# Altium PCB PCB1.PcbDoc
Units mm, origin at the board's own origin, x right, y up, seen from the top; angles counter-clockwise.
Board outline 43.65 x 62.3 mm, 2 copper layers (Top Layer, Bottom Layer); 52 components, 39 nets, 199 pads, 359 vias.
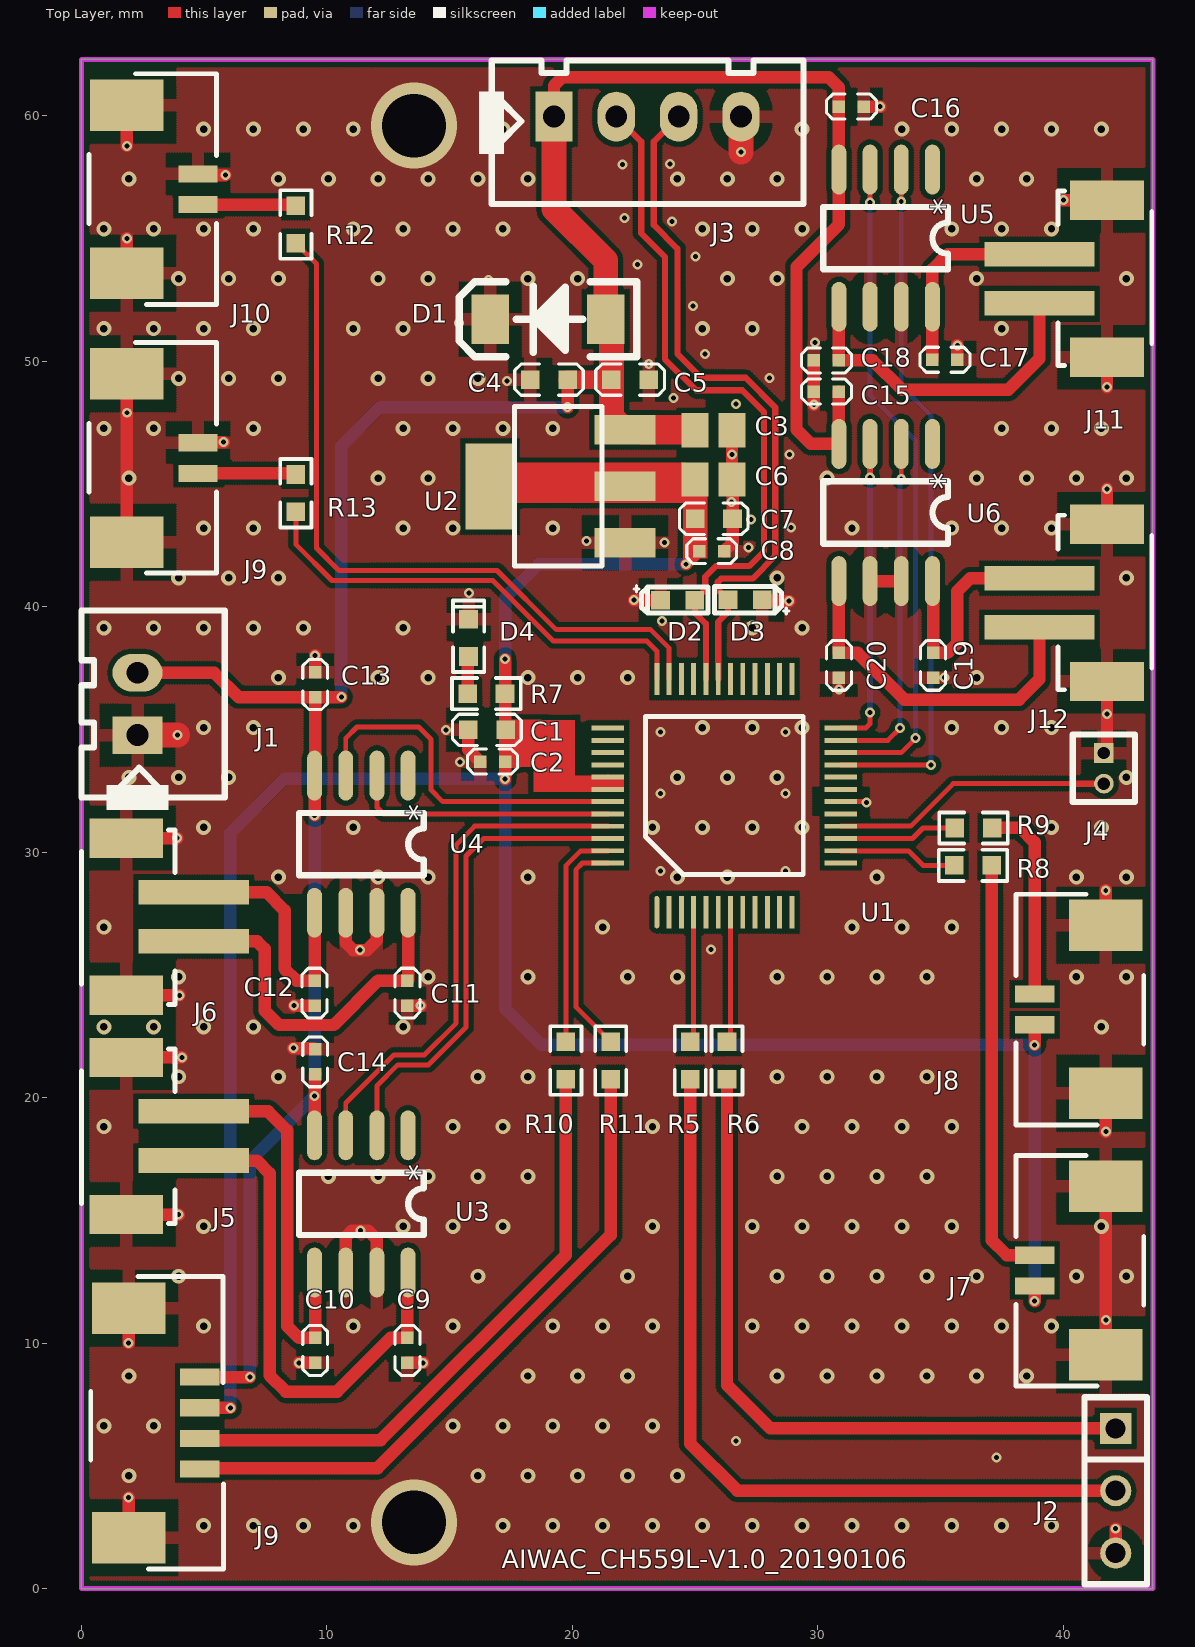
[diagram p0: Top Layer view]
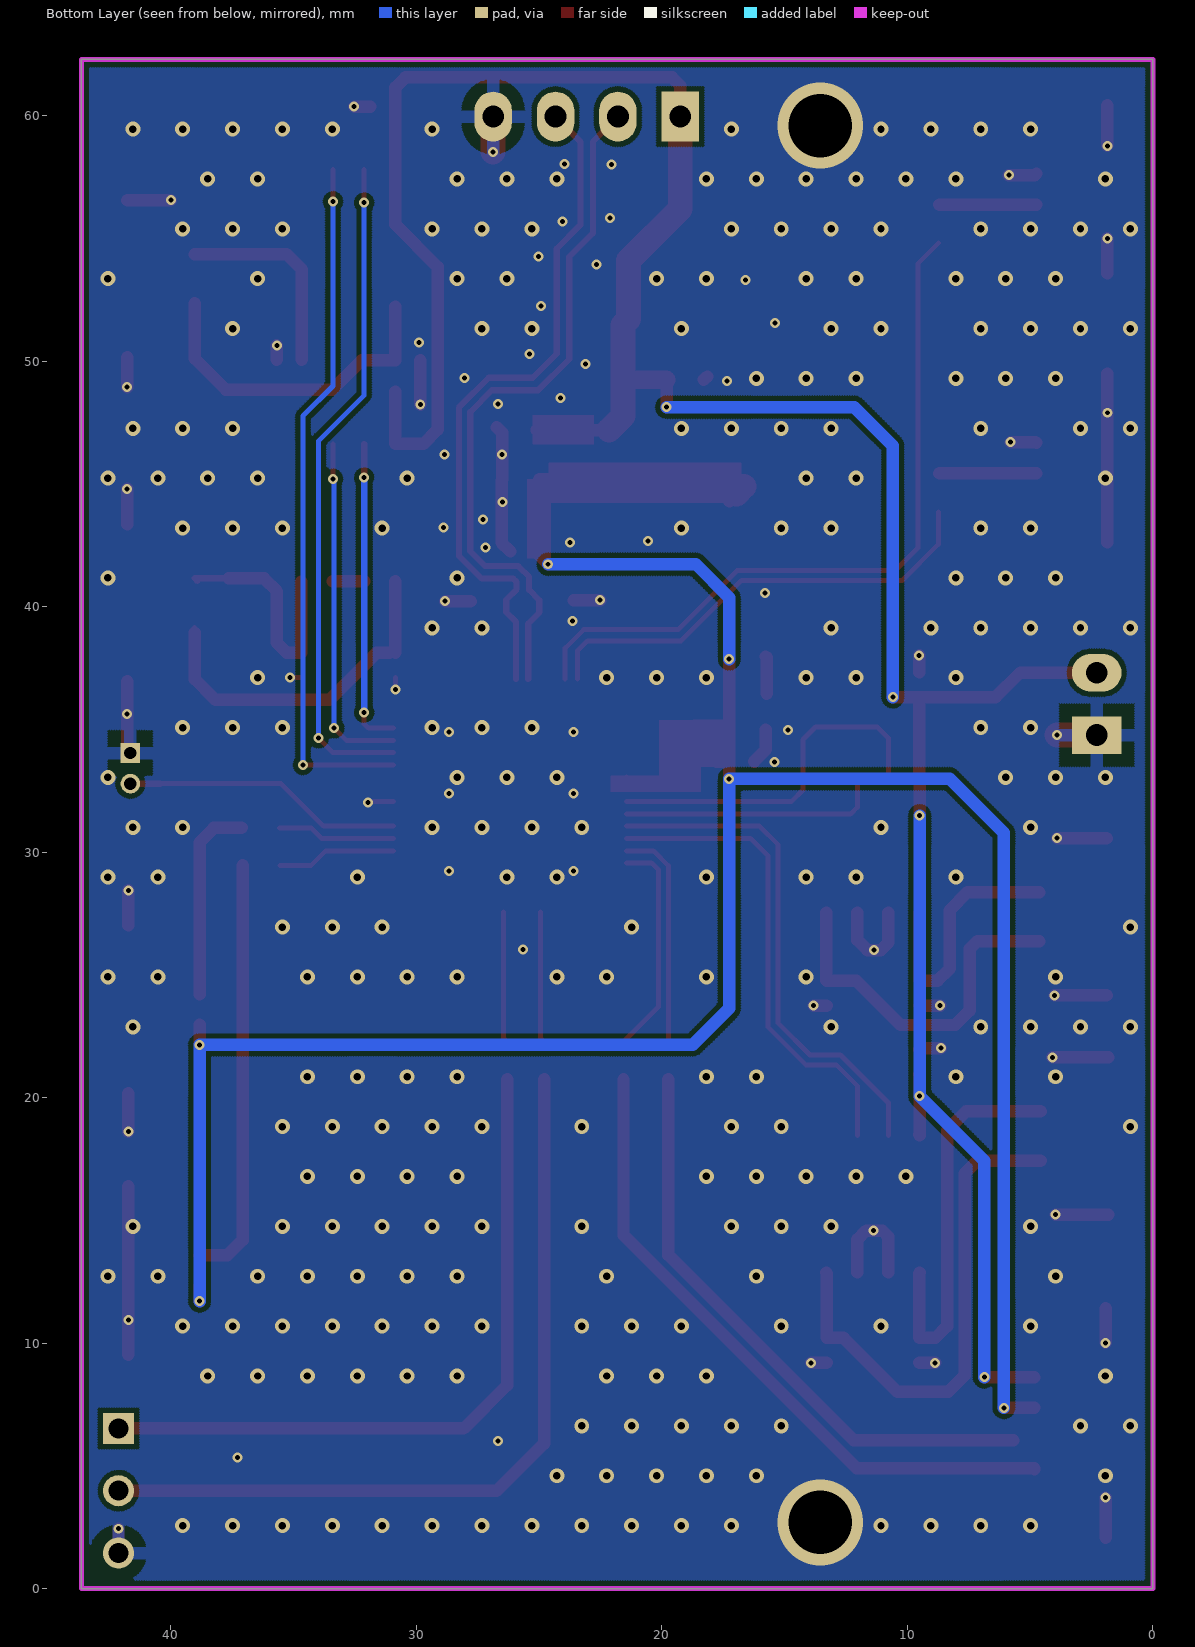
[diagram p1: Bottom Layer view, seen from below]
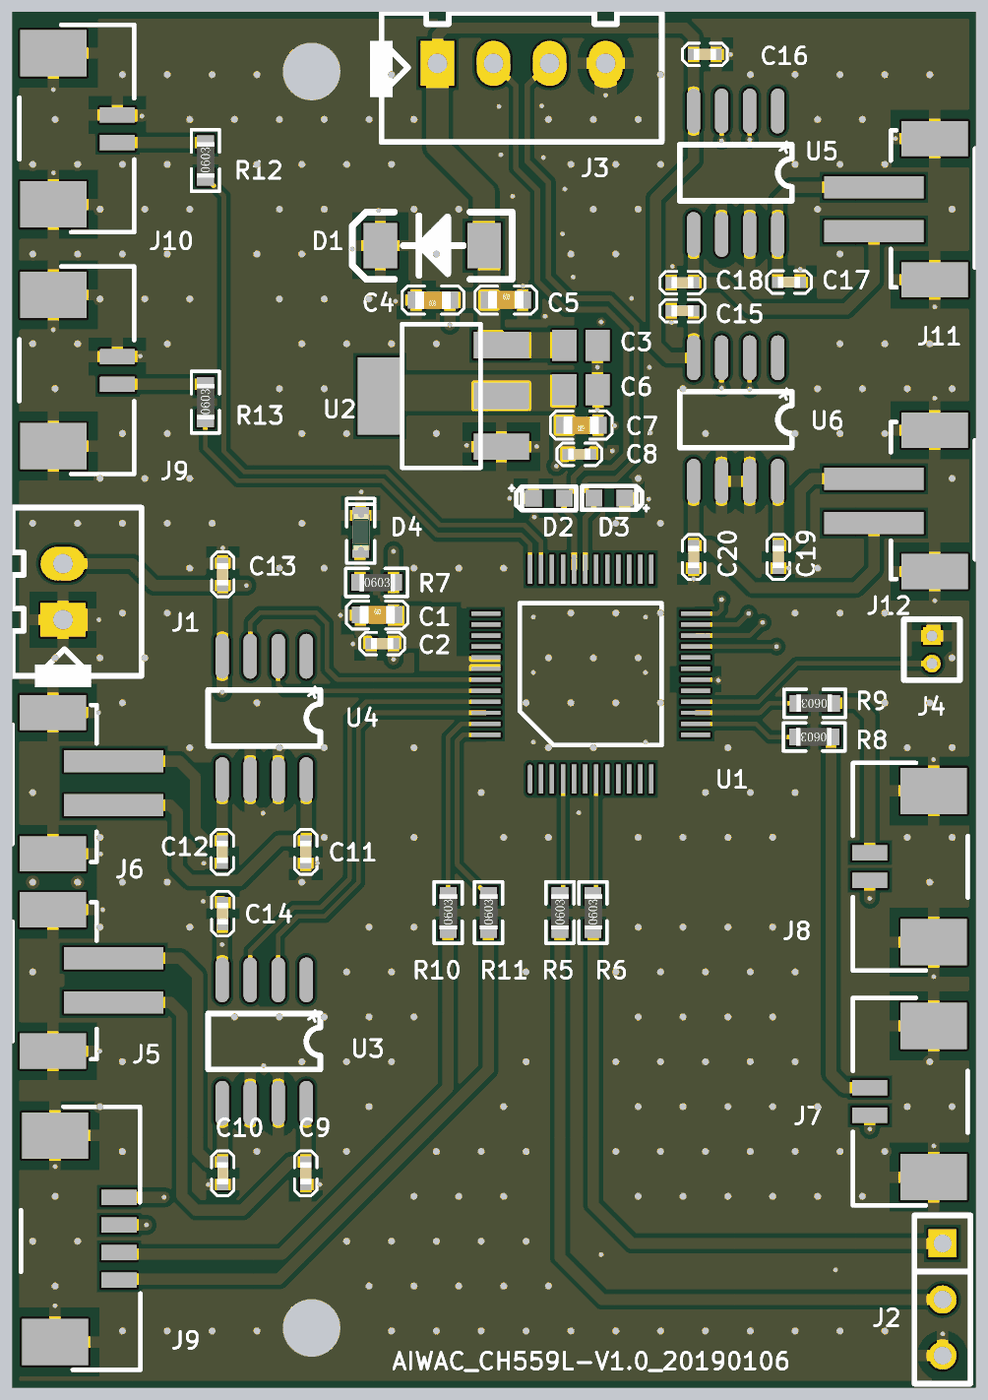
[diagram p2: 3D render of the assembled board from above, using the file's embedded part models]

## Layer stack, top to bottom
Top Solder: solder mask 0.0102, Solder Resist, Dk 3.5
Top Layer: signal copper 0.0356
Dielectric 1: dielectric 0.32, FR-4, Dk 4.8
Bottom Layer: signal copper 0.0356
Bottom Solder: solder mask 0.0102, Solder Resist, Dk 3.5

## Board outline
0,0 0,62.3 43.65,62.3 43.65,0

## Design rules (kind name [scope] priority, off if disabled: settings)
Clearance Clearance_1 [All] p1: gap=0.203 ignorepadtopadclearanceinfootprint=FALSE except(0: Arc-Hole Track-Hole SMDPad-Hole THPad-Hole Via-Hole Fill-Hole Poly-Hole Region-Hole Text-Hole)
DiffPairsRouting [All] p1: maxlimit=0.254 minlimit=0.254 mostfreqgap=0.254 toplayer_minwidth=0.254 toplayer_maxwidth=0.381 toplayer_prefwidth=0.254 bottomlayer_minwidth=0.254 bottomlayer_maxwidth=0.381 bottomlayer_prefwidth=0.254 maxuncoupledlength=12.7
MinimumSolderMaskSliver [All] p1: minsoldermaskwidth=0.051
PlaneConnect [All] p1: planeconnectstyle=Direct reliefexpansion=0.508 reliefentries=4 reliefconductorwidth=0.254 reliefairgap=0.254
PolygonConnect [IsVia] p1: connectstyle=Direct reliefconductorwidth=0.254 reliefentries=4 polygonreliefangle="90 Angle" airgapwidth=0.508
PolygonConnect PolygonConnect_1 [All] p2: connectstyle=Relief reliefconductorwidth=0.508 reliefentries=4 polygonreliefangle="90 Angle" airgapwidth=0.508
RoutingVias [All] p1: holewidth=0.203 width=0.406 viastyle="Through Hole" minholewidth=0.203 minwidth=0.406 maxholewidth=0.203 maxwidth=0.406
SilkToSilkClearance [All] p1: silktosilkclearance=0.051
SilkToSolderMaskClearance [IsPad] p1: minsilkscreentomaskgap=0.051 clearancetoexposedcopper=TRUE
SolderMaskExpansion [All] p1: expansion=0.102
Width [All] p1: maxlimit=0.508 minlimit=0.203 preferedwidth=0.254 minimp=50.000000 maximp=50.000000 favimp=50.000000
25 further rules are at their usual default settings.

## Components (designator, comment, footprint, x,y, rotation, side; value= is the part's Value field where it differs from the comment)
C1 "106K50V" C0603 15.761,34.989 r0 top
C2 "104J10V" C0402 16.243,33.693 r0 top
C3 "226M50V" C0805 25.756,47.193 r0 top
C4 "106K50V" C0603 19.812,49.251 r180 top
C5 "105K16V" C0603 21.59,49.251 r0 top
C6 "226M50V" C0805 25.756,45.187 r0 top
C7 "105K16V" C0603 26.528,43.586 r180 top
C8 "104J10V" C0402 25.171,42.266 r0 top
C9 "104J10V" C0402 13.284,9.195 r90 top
C10 "104J10V" C0402 9.525,10.211 r270 top
C11 "104J10V" C0402 13.284,23.749 r90 top
C12 "104J10V" C0402 9.5,24.765 r270 top
C13 "104J10V" C0402 9.525,36.322 r90 top
C14 "104J10V" C0402 9.525,20.955 r90 top
C15 "104J10V" C0402 30.861,48.768 r180 top
C16 "104J10V" C0402 30.861,60.376 r0 top
C17 "104J10V" C0402 35.687,50.063 r180 top
C18 "104J10V" C0402 30.861,50.038 r180 top
C19 "104J10V" C0402 34.696,37.109 r90 top
C20 "104J10V" C0402 30.861,38.125 r270 top
D1 "SMAJ5.0CA" DO-214 21.361,51.714 r180 top
D2 "ESDA_TR1/0603" HS_0603D 24.295,40.272 r0 top
D3 "ESDA_TR1/0603" HS_0603D 27.038,40.284 r180 top
D4 "LED0603G" D-LED0603G 15.773,37.973 r90 top
J1 "XH1.25-2P" XH2.54-2p 2.286,34.773 r90 top
J2 "S2.54-3P" S2.54-3P 42.139,6.528 r270 top
J3 "Header 4" XH2.54-4P 19.253,59.969 r0 top
J4 "XH1.25-2P" S1.25-2P 41.656,34.041 r270 top
J5 "SH1.0-T-1-LT-2A_卧式" J-SH2.0-T-1-LT-2A_立式 4.572,19.44 r270 top locked
J6 "SH1.0-T-1-LT-2A_卧式" J-SH2.0-T-1-LT-2A_立式 4.572,28.372 r270 top locked
J7 "XH1.27-2P" J-SH1.27-2 38.837,13.583 r270 top
J8 "XH1.27-2P" J-SH1.27-2 38.837,24.223 r270 top
J9 "Header 4" "J-SH1.27 -4" 4.826,4.866 r90 top
J9 "XH1.27-2P" J-SH1.27-2 4.75,45.435 r90 top locked (schematic designator J?)
J10 "XH1.27-2P" J-SH1.27-2 4.75,56.383 r90 top
J11 "SH1.0-T-1-LT-2A_卧式" J-SH2.0-T-1-LT-2A_立式 39.033,52.365 r90 top
J12 "SH1.0-T-1-LT-2A_卧式" J-SH2.0-T-1-LT-2A_立式 39.033,39.158 r90 top locked
R5 "22R" R0603 24.803,20.752 r90 top
R6 "22R" R0603 26.302,20.752 r90 top
R7 "2K" R0603 15.735,36.462 r0 top
R8 "1k" R0603 37.084,29.464 r180 top
R9 "1k" R0603 37.109,30.988 r180 top
R10 "1k" R0603 19.736,20.752 r90 top
R11 "1k" R0603 21.565,20.752 r90 top
R12 "1k" R0603 8.738,54.813 r90 top
R13 "1k" R0603 8.738,43.866 r90 top
U1 "CH559L" LQFP48 23.444,27.559 r90 top
U2 "1117-3.3V" SOT-223 22.149,44.907 r90 top
U3 "PTC918" SO-8 13.31,18.466 r270 top
U4 "PTC918" SO-8 13.31,33.122 r270 top
U5 "PTC918" SO-8 34.671,57.81 r270 top
U6 "PTC918" SO-8 34.671,46.634 r270 top

## Footprints (in the part's own frame and the unit in brackets; to place one, negate y for a bottom-side part, rotate by r counter-clockwise, add the part's x,y. Pads: shape width x height; smd on the part's side, far side on the other; paste and mask are expansions set on the pad)
C0402 [mil]
  rect 20x20 smd: 1(0,0) 2(40,0)
  silkscreen extent -20,-20 60,20, body extent 0,-10 40,10, height 20
C0603 [mil]
  rect 30x30 smd: 1(0,0) 2(60,0)
  silkscreen extent -25,-25 85,25, body extent -1,-15 61,16, height 12
C0805 [mm] "Chip Capacitor, Body 2.0x1.3mm, IPC High Density"
  rect 1.1x1.4 smd: 1(-0.75,0) 2(0.75,0)
  body extent -1.1,-0.72 1.1,0.72, height 1.4
D-LED0603G [mil]
  rect 30x30 smd: 1(0,0) 2(60,0)
  silkscreen extent -25,-25 90,25, body extent -2,-16 62,15, height 24
DO-214 [mil]
  rect 60x80 smd: 1(0,0) 2(185,0)
  silkscreen extent -50,-60 235,60
HS_0603D [mil]
  rect 30x30 smd: 1(-27.5,0) 2(27.5,0)
  silkscreen extent -70,-21 49,23
"J-SH1.27 -4" [mm]
  rect 0.7x1.6 smd: 1(0,0) 2(1.25,0) 3(2.5,0) 4(3.75,0)
  rect 2.1x3 smd: 5(6.55,2.9) 6(-2.8,2.9)
  silkscreen extent -4.06,-0.96 7.85,4.44
J-SH1.27-2 [mm]
  rect 0.7x1.6 smd: 1(0,0) 2(1.25,0)
  rect 2.1x3 smd: 3(4.05,2.9) 4(-2.8,2.9)
  silkscreen extent -4.06,-0.76 5.33,4.45
J-SH2.0-T-1-LT-2A_立式 [mm]
  rect 1x4.5 smd: 1(0,0) 2(2,0)
  rect 1.6x3 smd: 3(-2.2,-2.75) 4(4.2,-2.75)
  silkscreen extent -2.54,-4.57 4.57,-0.76
LQFP48 [mm]
  oval 1.321x0.2 smd: 1(0,0)
  rect 1.321x0.2 smd: 2(0,-0.5) 3(0,-1) 4(0,-1.5) 5(0,-2) 6(0,-2.5) 7(0,-3) 8(0,-3.5) 9(0,-4) 10(0,-4.5) 11(0,-5) 12(0,-5.5) 25(9.5,-5.5) 26(9.5,-5) 27(9.5,-4.5) 28(9.5,-4) 29(9.5,-3.5) 30(9.5,-3) 31(9.5,-2.5) 32(9.5,-2) 33(9.5,-1.5) 34(9.5,-1) 35(9.5,-0.5) 36(9.5,0)
  rect 0.2x1.321 smd: 13(2,-7.5) 14(2.5,-7.5) 15(3,-7.5) 16(3.5,-7.5) 17(4,-7.5) 18(4.5,-7.5) 19(5,-7.5) 20(5.5,-7.5) 21(6,-7.5) 22(6.5,-7.5) 23(7,-7.5) 24(7.5,-7.5) 37(7.5,2) 38(7,2) 39(6.5,2) 40(6,2) 41(5.5,2) 42(5,2) 43(4.5,2) 44(4,2) 45(3.5,2) 46(3,2) 47(2.5,2) 48(2,2)
  silkscreen extent 1.54,-5.96 7.96,0.47
R0603 [mil]
  rect 30x30 smd: 1(0,0) 2(60,0)
  silkscreen extent -25,-25 85,25, body extent 0,-16 62,15, height 18
S1.25-2P [mm]
  rect 0.8x0.8 hole 0.5: 1(0,0)
  round 0.8 hole 0.5: 2(1.25,0)
  silkscreen extent -0.75,-1.27 2,1.27, body extent -0.41,-0.41 0.39,0.39, height 8
S2.54-3P [mil]
  rect 50x50 hole 32: 1(0,0)
  round 50 hole 32: 2(100,0) 3(200,0)
  silkscreen extent -50,-50 250,50, body extent -50,-50 250,50, height 315
SO-8 [mil]
  oval 80x24 smd: 1(0,0) 2(0,-50) 3(0,-100) 4(0,-150) 5(220,-150) 6(220,-100) 7(220,-50) 8(220,0)
  silkscreen extent 60,-175 160,25
SOT-223 [mm]
  rect 1.2x2.5 smd: 1(-2.3,0) 2(0,0) 3(2.3,0)
  rect 3.5x2 smd: 2(0,5.5)
  silkscreen extent -3.25,0.94 3.25,4.5
XH2.54-2p [mil]
  rect 60x80 hole 35: 1(0,0)
  oval 60x80 hole 35: 2(100,0)
  silkscreen extent -120,-140 200,90, body extent -100,-140 200,90, height 256
XH2.54-4P [mil]
  rect 60x80 hole 35: 1(0,0)
  oval 60x80 hole 35: 2(100,0) 3(200,0) 4(300,0)
  silkscreen extent -120,-140 400,90, body extent -100,-140 400,90, height 256

## Part data
C1 C4: library part C0603X7R-106K50V, "贴片电容-陶瓷", ="无编码 有封装", 生产商="风华 三星", 规格型号=10uF±10%_50V_X7R_C0603
C2 C8 C9 C10 C11 C12 C13 C14 C15 C16 C17 C18 C19 C20: library part C0402X7R-104J10V, "贴片电容-陶瓷", ="无编码 有封装", 生产商="风华 三星", 规格型号=100nF±5%_10V_X7R_C0402
C3 C6: library part C0805Y5V-226M50V, "贴片电容-陶瓷", =无封装无编码, 生产商="风华 三星", 规格型号=22uF±20%_50V_Y5V_C0805
C5 C7: library part C0603X7R-105K16V, "贴片电容-陶瓷", ="无编码 有封装", 生产商="风华 三星", 规格型号=1uF±10%_16V_X7R_C0603
D2 D3: library part "D Zener", "Zener Diode"
D4: library part DLED-0603-G, "贴片二极管-LED", 规格型号=0603-GREEN, 货品编码=无样品无编码
J1: library part J-XH2.54-2P_1, "接插件-2.54", 规格型号=XH2.54-2P, 货品编码=371007
J2: library part J-S2.54-3P, "单排排针-直针", 规格型号=S2.54-3P, 货品编码=372015
J3 J9: "Header, 4-Pin", LatestRevisionDate=17-Jul-2002, LatestRevisionNote="Re-released for DXP Platform.", Publisher="Altium Limited"
J4: library part J-XH2.54-2P, "接插件-2.54", 规格型号=XH2.54-2P, 货品编码=371007
J7 J8 J9 J10: library part J-XH1.27-2P, "接插件-1.27", 规格型号=XH2.54-2P, 货品编码=371007
R5 R6 R7 R8 R9 R10 R11 R12 R13: library part R0603-100RF, "贴片电阻-通用", 生产商="厚声 国巨", 规格型号=100R±1%_1/10W_±200ppm_R0603
U1: "单片机"
U2: library part "AP1117-33 SOT-223", "芯片 电源类", 单价=0.15
U3 U4 U5 U6: "马达驱动芯片"
D1: PCB DECAL=DO-214

## Via types
v1: diameter 0.61, hole 0.305, Top Layer to Bottom Layer, tented both sides, 264 vias
v2: diameter 0.406, hole 0.203, Top Layer to Bottom Layer, tented both sides, 93 vias
v3: diameter 3.5/3.5 (per signal layer), hole 2.6, Top Layer to Bottom Layer, tented both sides, 2 vias

## Nets (pads, with @x,y where several pads share a name; then routed paths per layer and width w, separated by ;. In a path a pad name is that pad's centre, name@x,y a point inside that pad or via, vN(x,y) a via of type N, cw(c..) or ccw(c..) an arc to the next point about the centre after c; other vN are vias at no path point)
3.3V_VCC: C1.2 C2.2 C6.1 C7.2 C8.1 J7.2 J8.2 J9.3@4.826,7.366 R7.2 U1.41 U1.42 U2.2 | length 114
  Top Layer w0.203: 17.78,33.693 19.266,33.693 20.4,32.559 U1.42 U1.41
  Top Layer w0.508: J9.3@4.826,7.366 v2(6.071,7.366) ; U2.2@16.649,44.907 22.149,44.907 22.428,45.187 25.004,45.187 C7.2 25.004,42.433 C8.1 ; U2.2@16.96,44.596 U2.2@17.259,44.297 ; v2(17.259,32.982) C2.2 ; v2(17.259,37.871) R7.2 C2.2 ; 17.78,33.693 C2.2 ; v2(24.638,41.732) C8.1 ; C8.1@24.943,42.266 C8.1 ; v2(38.837,11.709) J7.2 ; v2(38.837,22.149) J8.2
  Top Layer w1.016: U2.2@16.649,44.907 U2.2@16.96,44.596
  Bottom Layer w0.508: v2(6.071,7.366) 6.071,30.785 8.28,32.995 v2@17.259,32.995 ; v2(17.259,32.982) 17.259,23.635 18.745,22.149 v2(38.837,22.149) v2(38.837,11.709) ; v2(17.259,37.871) 17.259,40.375 18.617,41.732 v2(24.638,41.732)
5V_VCC: C3.1 C4.1 C5.1 C13.1 C14.1 C15.1 C16.1 D1.1 J1.2 J3.1 J9.4@4.826,8.616 U2.3 U3.4 U4.4 U5.4 U6.4 | length 114
  Top Layer w0.203: v2(10.592,36.322) v2@10.693,36.322
  Top Layer w0.508: J1.2 5.41,37.313 6.401,36.322 C13.1 ; J9.4@4.826,8.616 v2(6.863,8.616) ; U3.4 9.525,18.491 9.5,18.517 v2(9.5,20.066) 9.5,20.93 C14.1 ; v2(9.5,31.496) U4.4 9.525,33.147 C13.1 ; v2(10.592,36.322) C13.1 ; J3.1 19.253,61.235 19.588,61.57 30.455,61.57 30.861,61.163 C16.1 U5.4 30.861,55.575 29.134,53.848 29.134,47.219 29.718,46.634 U6.4 C15.1 ; v2(19.812,48.133) C4.1 ; U2.3 22.163,47.193 C3.1 ; C3.1@25.093,47.207 C3.1@25.107,47.193
  Top Layer w0.75: C4.1 C5.1
  Top Layer w1.016: J3.1 19.253,56.21 21.361,54.102 D1.1 21.59,51.486 C5.1 21.59,47.766 U2.3
  Bottom Layer w0.508: v2(6.863,8.616) 6.863,17.43 v2(9.5,20.066) v2(9.5,31.496) ; v2(10.592,36.322) 10.592,46.558 12.167,48.133 v2(19.812,48.133)
DM: D2.2 J3.2 U1.32 | length 28.6
  Top Layer w0.254: J3.2 22.809,58.953 22.809,55.22 23.774,54.254 23.774,50.093 25.049,48.819 26.924,48.819 27.813,47.93 27.813,42.266 27.203,41.656 25.85,41.656 25.413,41.219 25.413,40.691 D2.2 24.994,39.764 25.444,39.313 U1.32
DP: D3.2 J3.3 U1.31 | length 28.5
  Top Layer w0.254: J3.3 23.317,58.953 23.317,55.557 24.282,54.592 24.282,50.304 25.259,49.327 27.063,49.327 28.27,48.119 28.27,42.076 27.342,41.148 26.06,41.148 25.921,41.008 25.921,40.703 D3.2 26.34,39.776 25.944,39.381 U1.31
GND: C1.1 C2.1 C3.2 C4.2 C5.2 C6.2 C7.1 C8.2 C9.1 C10.2 C11.1 C12.2 C13.2 C14.2 C15.2 C16.2 C17.1 C18.2 C19.1 C20.2 D1.2 D2.1 D3.1 D4.2 J1.1 J2.3 J3.4 J4.1 J5.3 J5.4 J6.3 J6.4 J7.3 J7.4 J8.3 J8.4 J9.2@4.75,46.685 J9.3@1.85,49.485 J9.4@1.85,42.635 J9.5 J9.6 J10.2 J10.3 J10.4 J11.3 J11.4 J12.3 J12.4 U1.18 U2.1 U3.6 U3.7 U4.6 U4.7 U5.6 U5.7 U6.6 U6.7 | length 73
  Top Layer w0.203: D3.1 D3.1@27.788,40.234 ; v2(30.861,36.627) C20.2 ; U1.18 31.949,32.059 v2(31.979,32.029) ; C19.1 v2(35.154,37.109)
  Top Layer w0.508: J5.4 v2(3.962,15.24) ; J5.3 v2(4.089,21.641) ; J9.4@1.85,42.635 v2(1.85,47.904) J9.3@1.85,49.485 ; J10.4 v2(1.85,55.012) ; v2(1.85,58.78) J10.3 ; J6.4@1.873,24.172 v2(3.997,24.172) ; J6.3@1.873,30.572 v2(3.902,30.572) ; J9.6 v2(1.926,3.704) ; v2(1.926,10.012) J9.5 ; J9.2@4.75,46.685 4.775,46.711 v2(5.791,46.711) ; J10.2 4.801,57.582 v2(5.867,57.582) ; v2(8.636,22.022) 9.474,22.022 C14.2 ; v2(8.661,23.749) C12.2 ; v2(8.865,9.195) C10.2 ; C13.2 v2(9.525,38.024) ; U3.6 10.77,14.326 11.024,14.58 v2(11.379,14.58) 11.684,14.58 12.04,14.224 U3.7 ; U4.6 10.77,26.314 11.074,26.01 v2(11.354,26.01) 11.633,26.01 12.04,26.416 U4.7 ; C9.1 v2(13.919,9.195) ; C11.1 v2(13.818,23.749) ; C1.1 15.761,34.176 C2.1 ; C4.2@18.161,49.378 C4.2 ; v2(22.517,40.272) D2.1 ; C8.2 26.528,42.606 C7.1 26.528,45.164 C6.2 v2(26.506,46.203) 26.506,47.092 C3.2@26.721,47.307 ; D3.1@27.788,40.234 v2(28.829,40.234) ; v2(29.845,48.235) C15.2 C18.2 ; C16.2 v2(32.537,60.376) ; U6.6 U6.7 ; C17.1 v2(35.687,50.648) ; v2(40.006,56.565) J11.4 ; J4.1 41.783,34.168 v2(41.783,35.636) J12.3 ; v2(41.732,28.448) 41.737,28.444 J8.4 ; J7.3 v2(41.737,10.947) J7.4 ; v2(41.737,18.614) J8.3 ; J12.4 v2(41.783,44.806) ; v2(41.783,48.946) J11.3 ; J2.3 v2(42.139,2.438)
  Top Layer w1.016: J1.1 v2(3.912,34.773) ; v2(26.873,58.522) J3.4
  other v1: 4.978,2.565 7.01,2.565 9.042,2.565 11.074,2.565 17.17,2.565 19.202,2.565 21.234,2.565 23.266,2.565 25.298,2.565 27.33,2.565 29.362,2.565 31.394,2.565 33.426,2.565 35.458,2.565 37.49,2.565 39.522,2.565 1.93,4.597 16.154,4.597 18.186,4.597 20.218,4.597 22.25,4.597 24.282,4.597 0.914,6.629 2.946,6.629 15.138,6.629 17.17,6.629 19.202,6.629 21.234,6.629 23.266,6.629 1.93,8.661 18.186,8.661 20.218,8.661 22.25,8.661 28.346,8.661 30.378,8.661 32.41,8.661 34.442,8.661 36.474,8.661 38.506,8.661 4.978,10.693 11.074,10.693 15.138,10.693 19.202,10.693 21.234,10.693 23.266,10.693 27.33,10.693 29.362,10.693 31.394,10.693 33.426,10.693 35.458,10.693 37.49,10.693 39.522,10.693 3.962,12.725 16.154,12.725 22.25,12.725 28.346,12.725 30.378,12.725 32.41,12.725 34.442,12.725 36.474,12.725 40.538,12.725 42.57,12.725 4.978,14.757 13.106,14.757 15.138,14.757 17.17,14.757 23.266,14.757 27.33,14.757 29.362,14.757 31.394,14.757 33.426,14.757 35.458,14.757 41.554,14.757 10.058,16.789 12.09,16.789 14.122,16.789 16.154,16.789 18.186,16.789 28.346,16.789 30.378,16.789 32.41,16.789 34.442,16.789 0.914,18.821 15.138,18.821 17.17,18.821 23.266,18.821 27.33,18.821 29.362,18.821 31.394,18.821 33.426,18.821 35.458,18.821 3.962,20.853 8.026,20.853 16.154,20.853 18.186,20.853 28.346,20.853 30.378,20.853 32.41,20.853 34.442,20.853 0.914,22.885 2.946,22.885 4.978,22.885 7.01,22.885 13.106,22.885 41.554,22.885 3.962,24.917 14.122,24.917 18.186,24.917 22.25,24.917 24.282,24.917 28.346,24.917 30.378,24.917 32.41,24.917 34.442,24.917 40.538,24.917 42.57,24.917 0.914,26.949 21.234,26.949 31.394,26.949 33.426,26.949 35.458,26.949 8.026,28.981 12.09,28.981 14.122,28.981 18.186,28.981 24.282,28.981 26.314,28.981 32.41,28.981 40.538,28.981 42.57,28.981 4.978,31.013 11.074,31.013 23.266,31.013 25.298,31.013 27.33,31.013 29.362,31.013 39.522,31.013 41.554,31.013 1.93,33.045 3.962,33.045 5.994,33.045 24.282,33.045 26.314,33.045 28.346,33.045 42.57,33.045 4.978,35.077 7.01,35.077 25.298,35.077 27.33,35.077 29.362,35.077 35.458,35.077 37.49,35.077 39.522,35.077 8.026,37.109 12.09,37.109 14.122,37.109 18.186,37.109 20.218,37.109 22.25,37.109 36.474,37.109 0.914,39.141 2.946,39.141 4.978,39.141 7.01,39.141 9.042,39.141 13.106,39.141 27.33,39.141 29.362,39.141 3.962,41.173 5.994,41.173 8.026,41.173 28.346,41.173 42.57,41.173 4.978,43.205 7.01,43.205 13.106,43.205 15.138,43.205 19.202,43.205 31.394,43.205 35.458,43.205 37.49,43.205 39.522,43.205 1.93,45.237 12.09,45.237 14.122,45.237 30.378,45.237 36.474,45.237 38.506,45.237 40.538,45.237 42.57,45.237 0.914,47.269 2.946,47.269 7.01,47.269 13.106,47.269 15.138,47.269 17.17,47.269 19.202,47.269 37.49,47.269 39.522,47.269 41.554,47.269 3.962,49.301 5.994,49.301 8.026,49.301 12.09,49.301 14.122,49.301 16.154,49.301 0.914,51.333 2.946,51.333 4.978,51.333 7.01,51.333 11.074,51.333 13.106,51.333 19.202,51.333 25.298,51.333 27.33,51.333 37.49,51.333 3.962,53.365 5.994,53.365 8.026,53.365 12.09,53.365 14.122,53.365 18.186,53.365 20.218,53.365 26.314,53.365 28.346,53.365 36.474,53.365 42.57,53.365 0.914,55.397 2.946,55.397 4.978,55.397 7.01,55.397 11.074,55.397 13.106,55.397 15.138,55.397 17.17,55.397 25.298,55.397 27.33,55.397 29.362,55.397 35.458,55.397 37.49,55.397 39.522,55.397 1.93,57.429 8.026,57.429 10.058,57.429 12.09,57.429 14.122,57.429 16.154,57.429 18.186,57.429 24.282,57.429 26.314,57.429 28.346,57.429 36.474,57.429 38.506,57.429 4.978,59.461 7.01,59.461 9.042,59.461 11.074,59.461 17.17,59.461 29.362,59.461 33.426,59.461 35.458,59.461 37.49,59.461 39.522,59.461 41.554,59.461
  other v2: 37.287,5.334 26.67,6.02 25.654,26.035 23.597,29.235 28.677,29.235 23.597,32.385 28.677,32.385 15.418,33.68 23.597,34.9 28.677,34.9 14.859,34.976 23.647,39.421 15.799,40.564 27.178,42.418 23.749,42.621 20.574,42.672 28.905,43.231 27.28,43.561 26.492,44.272 28.854,46.203 26.67,48.26 24.13,48.514 17.348,49.2 28.042,49.327 23.114,49.886 25.4,50.292 29.896,50.775 15.392,51.562 24.917,52.248 16.586,53.315 22.657,53.95 25.019,54.28 24.054,55.702 22.123,55.829 22.047,58.014 23.978,58.039
  other v3: 13.55,2.7 13.55,59.6
INA1: U1.46 U3.2 | length 19.7
  Top Layer w0.203: U3.2 12.04,20.482 12.894,21.336 14.138,21.336 15.672,22.869 15.672,29.845 16.386,30.559 U1.46
INA2: U1.44 U4.2 | length 10.8
  Top Layer w0.203: U4.2 12.04,31.826 12.307,31.559 U1.44
INA3: U1.21 U5.2 | length 28.4
  Top Layer w0.203: U1.21 v2(34.62,33.559) ; v2(33.401,56.515) U5.2
  Bottom Layer w0.203: v2(33.401,56.515) 33.401,48.997 34.62,47.777 v2(34.62,33.559)
INA4: U1.23 U6.2 | length 14.2
  Top Layer w0.203: U1.23 32.857,34.559 v2(33.35,35.052) ; v2(33.401,45.212) U6.2
  Bottom Layer w0.203: v2(33.35,35.052) 33.35,45.161 v2(33.401,45.212)
INB1: U1.45 U3.3 | length 20.9
  Top Layer w0.203: U3.3 10.77,19.787 12.725,21.742 13.97,21.742 15.265,23.038 15.265,30.302 16.022,31.059 U1.45
INB2: U1.43 U4.3 | length 14.9
  Top Layer w0.203: U4.3 10.77,34.646 11.227,35.103 13.741,35.103 14.249,34.595 14.249,32.537 14.728,32.059 U1.43
INB3: U1.22 U5.3 | length 27.2
  Top Layer w0.203: U1.22 33.399,34.059 v2(33.985,34.646) ; v2(32.131,56.464) U5.3
  Bottom Layer w0.203: v2(32.131,56.464) 32.131,48.616 33.985,46.761 v2(33.985,34.646)
INB4: U1.24 U6.3 | length 12.7
  Top Layer w0.203: U1.24 31.96,35.059 32.131,35.23 v2(32.131,35.687)
  Top Layer w0.254: v2(32.131,45.263) U6.3
  Bottom Layer w0.254: v2(32.131,35.687) v2(32.131,45.263)
NetD4_1: D4.1 R7.1 | length 1.5
  Top Layer w0.508: R7.1 15.735,37.935 D4.1
NetJ2_1: J2.1 R6.1 | length 29
  Top Layer w0.508: R6.1 26.302,8.293 28.067,6.528 J2.1
NetJ2_2: J2.2 R5.1 | length 33
  Top Layer w0.508: R5.1 24.803,5.906 26.721,3.988 J2.2
NetJ4_2: J4.2 U1.16 | length 11.4
  Top Layer w0.203: U1.16 33.786,31.059 35.519,32.791 40.437,32.791
  Top Layer w0.254: 40.437,32.791 J4.2
NetJ7_1: J7.1 R8.1 | length 17.3
  Top Layer w0.508: R8.1 37.084,14.199 37.7,13.583 J7.1
NetJ8_1: J8.1 R9.1 | length 8.1
  Top Layer w0.508: R9.1 38.252,30.988 38.837,30.404 J8.1
NetJ9_1: J9.1@4.826,4.866 R11.1 | length 27.1
  Top Layer w0.508: J9.1@4.826,4.866 4.826,4.907 12.07,4.907 21.565,14.402 R11.1
NetJ9_1: J9.1@4.75,45.435 R13.2 | length 4
  Top Layer w0.254: R13.2@8.692,45.435 R13.2
  Top Layer w0.508: J9.1@4.75,45.435 R13.2@8.692,45.435
NetJ9_2: J9.2@4.826,6.116 R10.1 | length 24.3
  Top Layer w0.508: 5.69,6.045 12.192,6.045 19.736,13.589 R10.1
NetJ10_1: J10.1 R12.2 | length 4
  Top Layer w0.254: R12.2@8.692,56.383 R12.2
  Top Layer w0.508: J10.1 R12.2@8.692,56.383
NetR5_2: R5.2 U1.4 | length 5.3
  Top Layer w0.203: R5.2 24.944,22.417 U1.4
NetR6_2: R6.2 U1.7 | length 5.3
  Top Layer w0.203: R6.2 26.444,22.418 U1.7
NetR8_2: R8.2 U1.14 | length 4.9
  Top Layer w0.203: U1.14 33.695,30.059 34.29,29.464 R8.2
NetR9_2: R9.2 U1.15 | length 4.8
  Top Layer w0.203: U1.15 33.861,30.559 34.29,30.988 R9.2
NetR10_2: R10.2 U1.47 | length 9.1
  Top Layer w0.203: R10.2 19.736,29.455 20.34,30.059 U1.47
NetR11_2: R11.2 U1.48 | length 9
  Top Layer w0.203: U1.48 20.415,29.559 20.142,29.286 20.142,23.698 R11.2
NetR12_1: R12.1 U1.35 | length 30.1
  Top Layer w0.203: R12.1 9.576,53.975 9.576,42.393 10.49,41.478 16.932,41.478 19.345,39.065 23.19,39.065 23.944,38.311 U1.35
NetR13_1: R13.1 U1.36 | length 19
  Top Layer w0.203: R13.1 8.738,42.545 10.211,41.072 16.764,41.072 19.228,38.608 23.038,38.608 23.444,38.202 U1.36
OUTA1: C9.2 J5.2 U3.8 | length 21
  Top Layer w0.508: J5.2 7.147,17.44 7.671,16.916 7.671,8.687 8.331,8.026 10.414,8.026 12.598,10.211 C9.2 13.284,12.852 U3.8
OUTA2: C11.2 J6.2 U4.8 | length 15.1
  Top Layer w0.508: J6.2@4.623,26.372 7.156,26.372 7.468,26.06 7.468,23.546 8.052,22.962 10.287,22.962 12.09,24.765 C11.2 13.31,24.79 U4.8
OUTA3: C17.2 J11.2 U5.8 | length 8.3
  Top Layer w0.508: C17.2 U5.8 34.671,53.746 35.29,54.365 J11.2
OUTA4: C19.2 J12.2 U6.8 | length 9.9
  Top Layer w0.254: U6.8 U6.8@34.696,41.021 ; J12.2@37.643,41.158 J12.2 J12.2@38.922,41.046
  Top Layer w0.508: U6.8@34.696,41.021 C19.2 35.281,38.125 35.687,38.532 35.687,40.64 36.205,41.158 J12.2@37.643,41.158
OUTB1: C10.1 J5.1 U3.5 | length 16.1
  Top Layer w0.508: J5.1 7.611,19.44 8.382,18.669 8.382,10.693 8.865,10.211 C10.1 9.525,12.852 U3.5
OUTB2: C12.1 J6.1 U4.5 | length 10.5
  Top Layer w0.508: J6.1@4.623,28.372 7.544,28.372 8.28,27.635 8.28,25.248 8.763,24.765 C12.1 U4.5
OUTB3: C18.1 J11.1 U5.5 | length 13.6
  Top Layer w0.508: U5.5 C18.1 32.233,50.038 33.426,48.844 37.77,48.844 39.033,50.107 J11.1
OUTB4: C20.1 J12.1 U6.5 | length 14.3
  Top Layer w0.203: C20.1 31.117,38.125 ; J12.1@39.033,38.938 J12.1
  Top Layer w0.508: C20.1 U6.5 ; 31.117,38.125 31.623,38.125 33.528,36.22 38.202,36.22 39.033,37.052 J12.1@39.033,38.938
pads on no net: U1.1 U1.2 U1.3 U1.5 U1.6 U1.8 U1.9 U1.10 U1.11 U1.12 U1.13 U1.17 U1.19 U1.20 U1.25 U1.26 U1.27 U1.28 U1.29 U1.30 U1.33 U1.34 U1.37 U1.38 U1.39 U1.40 U3.1 U4.1 U5.1 U6.1

## Polygon pours and split planes (outlines as drawn)
GND on Bottom Layer "Bottom Layer-No Net" (hatched 90Degree grid 0.102 track 0.127, remove dead copper, pour order 4): 0,62.3 43.65,62.3 43.65,0 0,0
GND on Top Layer "Bottom Layer-No Net" (hatched 90Degree grid 0.102 track 0.127, remove dead copper, pour order 6): 0,62.3 43.65,62.3 43.65,0 0,0

## Keep-outs
Keep-Out Layer:
  lines w0.2: 1,0.001 20,0.001 ; 0,0 0,62.3 43.65,62.3 43.65,0 0,0

## Other copper
Top Layer:
  rectangle net 3.3V_VCC: 17.018,33.477 18.745,35.408
  rectangle net 3.3V_VCC: 24.511,41.961 25.502,45.212
  rectangle net 3.3V_VCC: 19.406,32.461 22.098,33.122
  rectangle net 3.3V_VCC: 18.415,32.461 20.117,35.382
  rectangle net 3.3V_VCC: 16.764,44.221 24.623,45.872
  rectangle net 5V_VCC: 22.758,46.609 25.273,47.803
  pour cut-out: 20.193,35.382 20.218,35.357 20.752,35.357 20.752,33.452 20.371,33.071 20.091,33.35 20.091,35.357 20.117,35.382
  pour cut-out: 3.759,5.817 3.759,5.004 12.243,5.004 12.446,5.207 12.395,5.258 12.395,5.842 3.962,5.842
  pour cut-out: 10.922,19.939 10.973,19.888 10.973,17.399 11.186,17.185 12.09,17.185 12.09,17.831 12.294,18.034 11.887,18.44 11.887,20.32 11.532,20.32 11.151,19.939
  pour cut-out: 2.286,27.965 2.055,27.735 2.055,26.441 8.255,26.441 8.534,26.162 8.23,25.857 8.23,24.384 8.382,24.384 9.652,25.654 9.652,28.194 9.398,28.448 9.322,28.372 2.515,28.372 2.337,28.194
  pour cut-out: 2.286,19.329 2.286,17.628 2.896,17.018 7.899,17.018 8.382,17.501 8.382,18.669 7.747,19.304 2.438,19.304

## Silkscreen, mask and mechanical layers (free items; w line width, h text height)
Top Overlay:
  text "AIWAC_CH559L-V1.0_20190106" at 17.12,0.838 h0.76
Mechanical 1:
  lines w0.254: -0.085,63.246 -0.085,63.754 ; 1.439,62.992 -0.085,63.5 ; 1.439,64.008 -0.085,63.5 ; 14.478,63.5 -0.085,63.5 ; 29.002,63.5 43.565,63.5 ; 42.041,62.992 43.565,63.5 ; 42.041,64.008 43.565,63.5 ; 43.565,63.246 43.565,63.754 ; 44.196,1.524 44.704,0 ; 44.196,60.776 44.704,62.3 ; 44.45,0 44.958,0 ; 44.45,62.3 44.958,62.3 ; 44.704,24.65 44.704,0 ; 44.704,37.65 44.704,62.3 ; 45.212,1.524 44.704,0 ; 45.212,60.776 44.704,62.3
  text "43.65 (mm)" at 14.732,62.586 h1.52
  text "62.3 (mm)" at 45.618,24.904 h1.52 r90

## Text inside footprints (layer, text, board x,y; h text height)
U3: Top Overlay "*" at 12.827,17.297 h1.02 r270
U4: Top Overlay "*" at 12.827,31.953 h1.02 r270
U5: Top Overlay "*" at 34.188,56.642 h1.02 r270
U6: Top Overlay "*" at 34.188,45.466 h1.02 r270